# Altium PCB pcb.PcbDoc (part 2 of 2)
Units mm, origin at the board's own origin, x right, y up, seen from the top; angles counter-clockwise.
Board outline 168.75 x 59.75 mm, 2 copper layers (Top Layer, Bottom Layer); 142 components, 131 nets, 492 pads, 85 vias.
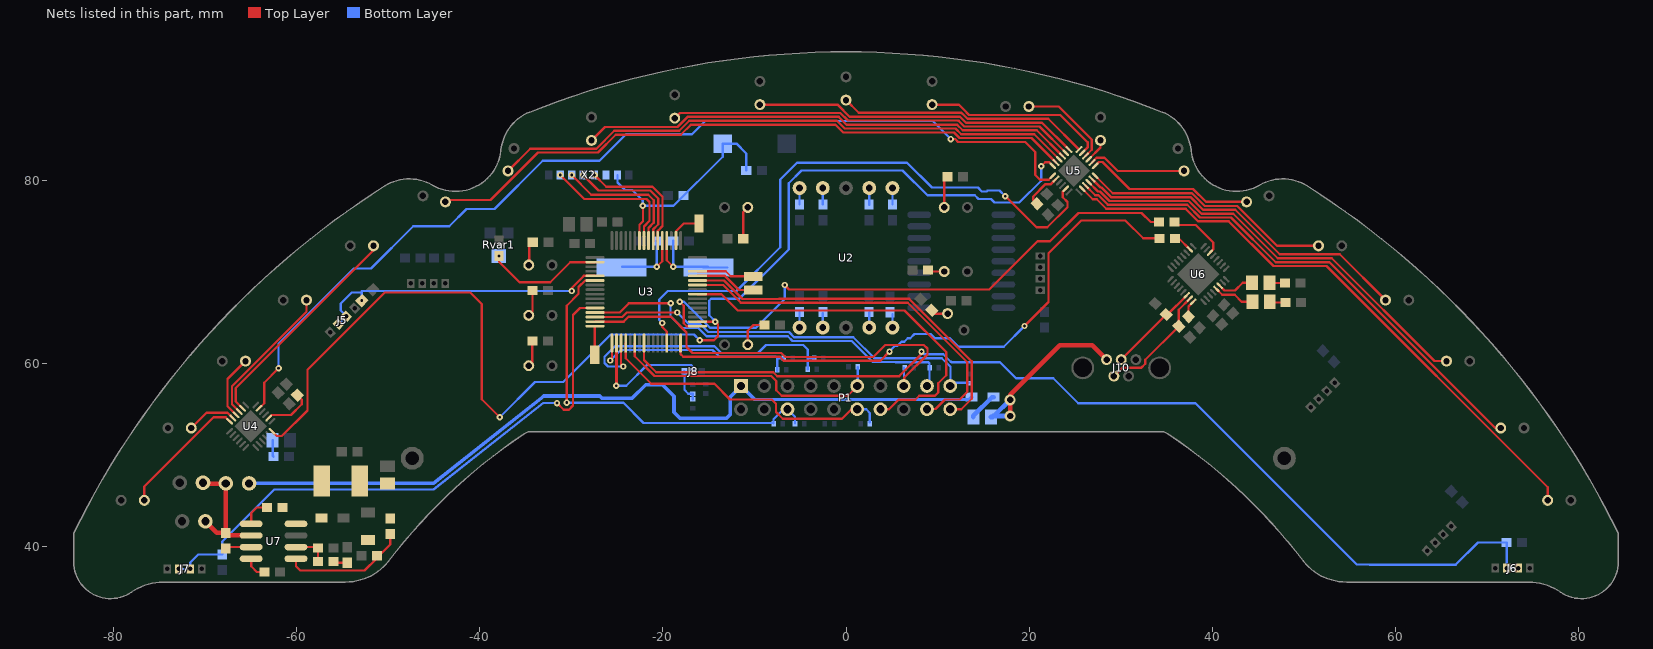
[diagram p2: the nets of this part, all layers, seen from the top]

## Via types
v1: diameter 0.7, hole 0.3, Top Layer to Bottom Layer, tented both sides, 82 vias
v2: diameter 1.2, hole 0.7, Top Layer to Bottom Layer, tented both sides, 2 vias
v3: diameter 1, hole 0.5, Top Layer to Bottom Layer, tented both sides, 1 vias

## Nets (pads, with @x,y where several pads share a name; then routed paths per layer and width w, separated by ;. In a path a pad name is that pad's centre, name@x,y a point inside that pad or via, vN(x,y) a via of type N, cw(c..) or ccw(c..) an arc to the next point about the centre after c; other vN are vias at no path point) (continued)
MOT-_OUT: P1.14 U3.40 | length 41.8
  Top Layer w0.25: U3.40@-16.225,67.525 -13.613,67.525 -11.833,65.745 -6.811,65.745 -6.806,65.75 6.4,65.75 10.95,61.2 10.95,58.675 10.075,57.8 10.075,56.775 9.72,56.42 7.995,56.42 7.57,55.995 5.745,55.995 4.7,54.95 4.19,54.95 P1.14@3.82,55.32
NetC5_1: C5.1 U6.16 | length 1.8
  Top Layer w0.25: C5.1@37.425,65.075 37.425,66.175 U6.16@37.934,66.684
NetC6_1: C6.1 U7.1 | length 3.2
  Top Layer w0.25: U7.1@-65,42.43 -65,43.6 -64.375,44.225 C6.1@-63.25,44.225
NetC6_2: C6.2 D33.1 L1.1 U7.8
NetC9_1: C9.1 FB4.1 L1.2 R48.2
NetC10_1: C10.1 C11.1 U7.6 | length 3.8
  Top Layer w0.25: U7.6@-60.1,39.89 C11.1@-57.79,39.89 ; C10.1@-57.7,38.3 C11.1@-57.7,39.8
NetC10_2: C10.2 R47.1 | length 1.4
  Top Layer w0.25: C10.2@-55.875,38.175 R47.1@-54.5,38.175
NetC12_1: C12.1 D35.2 F1.2 R45.1 U7.2 | length 12.9
  Top Layer w0.5: D35.2@-70.135,46.8 F1.2@-67.825,46.8 ; C12.1@-70,42.7 -68.75,41.45 R45.1@-67.775,41.45 F1.2@-67.775,46.85 ; R45.1@-67.485,41.16 U7.2@-65,41.16
NetC13_1: C13.1 U7.4 | length 2.5
  Top Layer w0.25: U7.4@-65,38.62 -65,37.8 -64.375,37.175 C13.1@-63.55,37.175
NetD1_1: D1.1 R1.1 | length 3.5
  Top Layer w0.25: D1.1@10.73,77.002 10.73,79.98 R1.1@11.1,80.35
NetD2_2: D2.2 R10.1 | length 3.6
  Top Layer w0.25: D2.2@-10.73,62 -10.73,63.52 -10.1,64.15 R10.1@-8.925,64.15
NetD3_2: D3.2 R11.1 | length 3.6
  Top Layer w0.25: R11.1@-11.225,73.575 -11.225,76.507 D3.2@-10.73,77.002
NetD4_1: D4.1 R6.1 | length 2.7
  Top Layer w0.25: D4.1@-34.663,70.706 -34.6,70.769 -34.6,72.825 R6.1@-34.225,73.2
NetD5_1: D5.1 R7.1 | length 1.6
  Top Layer w0.25: R7.1@9.098,70.002 D5.1@10.73,70.002
NetD6_1: D6.1 R15.1 | length 2.9
  Top Layer w0.25: D6.1@-34.663,65.206 -34.25,65.619 R15.1@-34.25,67.925
NetD7_1: D7.1 R16.1 | length 1.9
  Top Layer w0.25: R16.1@9.375,65.775 9.75,65.4 D7.1@11.102,65.4
NetD8_1: D8.1 R20.1 | length 2.9
  Top Layer w0.25: D8.1@-34.663,59.706 -34.275,60.094 R20.1@-34.275,62.425
NetD9_2: D9.2 U4.12 | length 14.1
  Top Layer w0.25: D9.2@-76.672,44.998 -76.672,46.503 -69.1,54.075 -67.787,54.075 U4.12@-67.35,53.638
NetD10_2: D10.2 U4.11 | length 5.5
  Top Layer w0.25: D10.2@-71.542,52.899 -69.866,54.575 -67.58,54.575 U4.11@-66.997,53.992
NetD11_2: D11.2 U4.10 | length 7.1
  Top Layer w0.25: U4.10@-66.643,54.345 -67.575,55.277 -67.575,58.254 D11.2@-65.613,60.216
NetD12_2: D12.2 U4.9 | length 15.9
  Top Layer w0.25: U4.9@-66.29,54.699 -67.09,55.499 -67.09,57.46 -58.952,65.598 D12.2@-58.952,66.881
NetD13_2: D13.2 U4.8 | length 24.3
  Top Layer w0.25: U4.8@-65.936,55.052 -66.67,55.786 -66.67,57.28 -51.631,72.319 D13.2@-51.631,72.81
NetD14_2: D14.2 U5.23 | length 71.9
  Top Layer w0.25: D14.2@-43.773,77.611 -43.56,77.825 -38.831,77.825 -33.655,83.001 -27.099,83.001 -25.148,84.952 -18.048,84.952 -16.95,86.05 -1.15,86.05 -0.3,85.2 11.794,85.2 12.409,84.585 20.274,84.585 U5.23@22.947,81.912
NetD15_2: D15.2 U5.22 | length 64.3
  Top Layer w0.25: D15.2@-36.935,80.99 -34.5,83.425 -27.275,83.425 -25.324,85.376 -18.231,85.376 -17.133,86.474 -0.974,86.474 -0.124,85.624 11.931,85.624 11.935,85.62 11.968,85.62 12.583,85.005 20.561,85.005 U5.22@23.301,82.265
NetD16_2: D16.2 U5.21 | length 54.3
  Top Layer w0.25: D16.2@-27.812,84.325 -26.337,85.8 -18.406,85.8 -17.308,86.898 -0.799,86.898 0.051,86.048 12.101,86.048 12.109,86.04 12.142,86.04 12.757,85.425 20.848,85.425 U5.21@23.654,82.619
NetD17_2: D17.2 U5.20 | length 44.8
  Top Layer w0.25: D17.2@-18.712,86.763 -18.153,87.322 -0.623,87.322 0.207,86.492 12.257,86.492 12.289,86.46 12.316,86.46 12.931,85.845 21.135,85.845 U5.20@24.008,82.972
NetD18_2: D18.2 U5.19 | length 35.8
  Top Layer w0.25: D18.2@-9.408,88.237 -0.938,88.237 0.383,86.916 12.433,86.916 12.469,86.88 12.49,86.88 13.105,86.265 21.422,86.265 U5.19@24.361,83.326
NetD19_2: D19.2 U5.18 | length 27.7
  Top Layer w0.25: D19.2@0,88.73 1.39,87.34 12.608,87.34 12.648,87.3 12.664,87.3 13.279,86.685 22.098,86.685 U5.18@25.457,83.326
NetD20_2: D20.2 U5.17 | length 20.1
  Top Layer w0.25: D20.2@9.408,88.237 12.311,88.237 12.828,87.72 12.838,87.72 13.453,87.105 23.42,87.105 26.4,84.125 26.4,83.561 U5.17@25.811,82.972
NetD21_2: D21.2 U5.16 | length 10.5
  Top Layer w0.25: D21.2@19.982,88.033 23.242,88.033 26.85,84.425 26.85,83.304 U5.16@26.165,82.619
NetD22_2: D22.2 U5.15 | length 2.6
  Top Layer w0.25: U5.15@26.518,82.265 27.812,83.559 D22.2@27.812,84.325
NetD23_2: D23.2 U5.14 | length 10.9
  Top Layer w0.25: U5.14@26.872,81.912 27.385,82.425 28.25,82.425 29.685,80.99 D23.2@36.935,80.99
NetD24_2: D24.2 U5.13 | length 18.5
  Top Layer w0.25: U5.13@27.225,81.558 27.642,81.975 28.025,81.975 30.975,79.025 37.925,79.025 39.339,77.611 D24.2@43.773,77.611
NetD25_2: D25.2 U5.12 | length 27.6
  Top Layer w0.25: U5.12@27.225,80.462 29.137,78.55 37.806,78.55 39.197,77.159 42.75,77.159 47.099,72.81 D25.2@51.631,72.81
NetD26_2: D26.2 U5.11 | length 37.6
  Top Layer w0.25: U5.11@26.872,80.108 27.805,79.175 27.918,79.175 28.963,78.13 37.632,78.13 39.023,76.739 42.528,76.739 47.388,71.879 53.954,71.879 D26.2@58.952,66.881
NetD27_2: D27.2 U5.10 | length 47.2
  Top Layer w0.25: U5.10@26.518,79.755 27.522,78.751 27.748,78.751 28.789,77.71 37.458,77.71 38.849,76.319 42.306,76.319 47.185,71.44 53.085,71.44 64.309,60.216 D27.2@65.613,60.216
NetD28_2: D28.2 U5.9 | length 56.4
  Top Layer w0.25: U5.9@26.165,79.401 27.239,78.327 27.578,78.327 28.615,77.29 37.284,77.29 38.675,75.899 42.076,75.899 46.955,71.02 52.83,71.02 70.951,52.899 D28.2@71.542,52.899
NetD29_2: D29.2 U5.8 | length 65.8
  Top Layer w0.25: U5.8@25.811,79.048 26.956,77.903 27.408,77.903 28.441,76.87 37.11,76.87 38.501,75.479 41.821,75.479 46.7,70.6 52.5,70.6 76.672,46.428 D29.2@76.672,44.998
NetD30_2: D30.2 FB1.2 | length 3.2
  Bottom Layer w0.5: FB1.2@13.925,54.1 13.925,54.244 15.956,56.275 D30.2@16.125,56.275
NetD31_1: D31.1 U6.22 | length 4.1
  Top Layer w0.25: U6.22@40.833,68.452 41.361,67.925 42.5,67.925 43.35,68.775 D31.1@44.375,68.775
NetD31_2: D31.2 R42.2 | length 1.7
  Top Layer w0.25: D31.2@46.3,68.75 R42.2@47.975,68.75
NetD32_1: D32.1 U6.21 | length 4.5
  Top Layer w0.25: U6.21@40.48,68.099 41.124,67.455 42.47,67.455 43.225,66.7 D32.1@44.4,66.7
NetD32_2: D32.2 R43.2 | length 1.6
  Top Layer w0.25: D32.2@46.375,66.625 R43.2@48,66.625
NetD34_2: D34.2 R46.1 | length 1.8
  Bottom Layer w0.25: D34.2@-62.65,51.55 -62.65,49.875 R46.1@-62.55,49.775
NetFB1_1: FB1.1 J10.1 | length 20.5
  Top Layer w0.5: v2(17.935,54.209) v2(17.935,55.984) 17.935,56.535 23.35,61.95 26.9,61.95 J10.1@28.475,60.375
  Bottom Layer w0.5: FB1.1@15.825,54.1 16.051,54.1 FB1.1@16.16,54.209 ; FB1.1@16.051,54.209 FB1.1@16.16,54.209 ; v2(17.935,54.209) FB1.1@16.16,54.209 ; v2(17.935,55.984) FB1.1@16.16,54.209
NetJ8_3: J8.3 R38.1 R39.2 | length 4
  Bottom Layer w0.25: J8.3@-17.85,58.925 J8.3@-17.65,59.125 -17.65,57.075 -17.225,56.65 R38.1@-16.75,56.65 R39.2@-16.75,56.05
NetR2_2: R2.2 U2.1 | length 1.7
  Bottom Layer w0.25: U2.1@-5.08,63.88 R2.2@-5.08,65.58
NetR3_1: R3.1 U2.10 | length 1.8
  Bottom Layer w0.25: R3.1@-5.08,77.32 U2.10@-5.08,79.12
NetR4_2: R4.2 U2.2 | length 1.6
  Bottom Layer w0.25: U2.2@-2.54,63.88 R4.2@-2.54,65.46
NetR5_1: R5.1 U2.9 | length 1.8
  Bottom Layer w0.25: R5.1@-2.54,77.34 U2.9@-2.54,79.12
NetR8_2: R8.2 U2.4 | length 1.7
  Bottom Layer w0.25: U2.4@2.54,63.88 R8.2@2.54,65.56
NetR9_1: R9.1 U2.7 | length 1.8
  Bottom Layer w0.25: R9.1@2.525,77.3 U2.7@2.525,79.105
NetR12_2: R12.2 U2.5 | length 1.4
  Bottom Layer w0.25: U2.5@5.08,63.88 R12.2@5.08,65.32
NetR13_1: R13.1 U2.6 | length 1.8
  Bottom Layer w0.25: R13.1@5.08,77.32 U2.6@5.08,79.12
NetR25_1: R25.1 U4.2 | length 5.4
  Top Layer w0.25: U4.2@-63.072,53.992 -62.739,54.325 -60.65,54.325 -59.475,55.5 -59.475,56.025 R25.1@-59.95,56.5
NetR33_1: R33.1 U5.2 | length 4
  Top Layer w0.25: R33.1@20.7,77.6 20.45,77.85 20.45,78.2 21.8,79.55 22.389,79.55 U5.2@22.947,80.108
NetR40_1: R40.1 U6.30 | length 6.2
  Top Layer w0.25: R40.1@35.95,75.075 38.212,75.075 40.125,73.162 40.125,72.411 U6.30@39.773,72.058
NetR41_1: R41.1 U6.2 | length 1.7
  Top Layer w0.25: R41.1@36.368,73.625 U6.2@37.581,72.412
NetR45_2: R45.2 U7.3 | length 2.6
  Top Layer w0.25: R45.2@-67.635,39.89 U7.3@-65,39.89
NetR48_1: R48.1 R49.2 U7.5 | length 13.9
  Top Layer w0.25: U7.5@-60.1,38.62 -60.1,37.8 -59.625,37.325 -52.6,37.325 -51.25,38.675 R49.2@-51.25,38.95 ; R49.2@-51.2,39 R49.2@-51.25,38.95 ; R48.1@-49.8,41.3 -49.8,40.175 -51.025,38.95 R49.2@-51.25,38.95
NetU3_16: U3.16 X8.1 | length 3.1
  Top Layer w0.25: X8.1@-27.45,60.9 U3.16@-27.45,64
NetU3_44: U3.44 X5.1 | length 6.7
  Top Layer w0.25: U3.44@-16.225,69.525 -13.231,69.525 -11.681,67.975 X5.1@-10.125,67.975
NetU3_45: U3.45 X6.1 | length 6.3
  Top Layer w0.25: U3.45@-16.225,70.025 -13.137,70.025 -12.587,69.475 X6.1@-10.125,69.475
NetU3_50: U3.50 X7.1 | length 3.9
  Top Layer w0.25: U3.50@-18.575,73.375 -18.575,74.406 -17.731,75.25 X7.1@-16.075,75.25
NetU4_5: U4.5 U5.1 | length 106.9
  Top Layer w0.25: U4.5@-64.133,55.052 -63.575,55.61 -63.575,57.85 v1(-62,59.425) ; v1(11.45,84.475) 11.925,84.475 12.25,84.15 19.575,84.15 20.675,83.05 20.675,80.55 21.2,80.025 22.157,80.025 U5.1@22.594,80.462
  Bottom Layer w0.25: v1(-62,59.425) -62,62.1 -53.775,70.325 -51.9,70.325 -47.275,74.95 -43.35,74.95 -41.475,76.825 -38.4,76.825 -33.125,82.1 -26.925,82.1 -24.025,85 -16.825,85 -15.375,86.45 9.475,86.45 v1(11.45,84.475)
NEUTRE_IN: J8.1 U3.18 | length 14.5
  Top Layer w0.3: v1(-25.1,57.525) -25.075,57.55 U3.18@-25.075,62.175
  Bottom Layer w0.25: v1(-25.1,57.525) -24,57.525 -21.75,59.775 -16.925,59.775 -16.7,59.55 J8.1@-16.7,59.125
NRST: C18.2 R44.1 SW1.2 U3.58 X2.2 | length 26.4
  Top Layer w0.25: U3.58@-22.575,73.375 -22.575,75.102 -22.18,75.497 -22.18,77.155 v1(-22.2,77.175)
  Bottom Layer w0.25: X2.2@-24.975,80.55 -24.975,79.725 -24.15,78.9 -23.35,78.9 -22.2,77.75 v1(-22.2,77.175) ; v1@-22.425,77.175 v1(-22.2,77.175) ; C18.2@-10.9,81.05 -10.9,82.9 -11.975,83.975 SW1.2@-13.475,83.975 -13.475,82.55 -18.85,77.175 v1(-22.2,77.175)
O\E\: U3.34 U4.24 U5.24 | length 132.4
  Top Layer w0.25: U4.24@-62.719,52.542 -62.202,52.025 -61.65,52.025 -58.85,54.825 -58.85,59.262 -50.412,67.7 -41.05,67.7 -39.8,66.45 -39.8,56.05 v1(-37.825,54.075) ; U3.34@-16.225,64.525 -14.25,64.525 -13.975,64.25 -13.975,62.95 -14.425,62.5 v1(-15.975,62.5) ; v1(21.325,81.5) 21.775,81.95 22.202,81.95 U5.24@22.594,81.558
  Bottom Layer w0.25: v1(-37.825,54.075) -33.975,57.925 -30.9,57.925 -25.7,63.125 -16.6,63.125 v1(-15.975,62.5) ; v1@-14.2,64.375 -14.25,64.425 -14.25,64.525 -14.95,65.225 -14.95,66.802 -14.712,67.04 -11.628,67.04 -6.255,72.413 -6.255,79.65 -4.855,81.05 6.185,81.05 8.91,78.325 14.075,78.325 14.485,77.915 15.848,77.915 16.22,77.542 18.942,77.542 21.325,79.925 v1(21.325,81.5)
  other v1: -14.3,64.525
OIL_IN: R27.1 R29.2 U3.19 | length 32
  Top Layer w0.25: U3.19@-24.575,62.175 -24.575,59.85 v1(-24.35,59.625)
  Bottom Layer w0.25: v1(-24.35,59.625) -24.355,59.63 -26.017,59.63 -26.395,60.008 -26.395,60.68 -25.23,61.845 -14.381,61.845 -13.641,61.105 -9.605,61.105 -8.73,61.98 -4.68,61.98 -4.175,61.475 -4.175,60.525 ; R27.1@-4.175,59.3 -4.175,60.525 ; R29.2@-3.475,60.525 -4.175,60.525
PAL_D: J6.2 J6.3 R22.1 U3.24 | length 112.8
  Top Layer w0.25: U3.24@-22.075,62.175 -22.075,60.331 -20.744,59 -7.945,59 -7.5,58.555 5.805,58.555 8.25,61 v1(8.25,61.25)
  Bottom Layer w0.25: v1(8.25,61.25) 8.535,60.965 10.635,60.965 11.45,60.15 11.487,60.15 11.547,60.09 16.835,60.09 18.575,58.35 22.637,58.35 25.377,55.61 38.177,55.61 55.807,37.98 57.195,37.98 57.2,37.975 66.625,37.975 69.05,40.4 72.15,40.4 R22.1@72.175,40.375 72.2,40.35 J6.3@72.2,37.6 J6.2@73.45,37.6
PAL_G: J7.2 J7.3 R23.1 U3.12 | length 64.3
  Top Layer w0.25: v1(-31.575,55.625) -30.85,54.9 -30.275,54.9 -29.82,55.355 -29.82,65.26 -29.055,66.025 U3.12@-27.425,66.025
  Bottom Layer w0.25: J7.3@-72.9,37.5 J7.2@-71.65,37.5 -71.65,38.2 -70.775,39.075 R23.1@-68.15,39.075 -68.15,40.5 -62.475,46.175 -45.075,46.175 -33.075,55.625 v1(-31.575,55.625)
POS1_IN: P1.12 R31.1 U3.20 | length 33.2
  Top Layer w0.25: U3.20@-24.075,62.175 -24.075,60.525 -21.275,57.725 -14.375,57.725 -12.675,56.025 -8.125,56.025 -7.65,55.55 -7.65,54.65 -6.9,53.9 -0.45,53.9 0.6,54.95 P1.12@1.25,54.95
  Bottom Layer w0.25: P1.12@1.25,54.95 2.2,54.95 2.6,54.55 R31.1@2.6,53.5
POS2_IN: P1.11 R30.1 U3.22 | length 30.3
  Top Layer w0.25: U3.22@-23.075,62.175 -23.075,60.737 -20.918,58.58 -8.18,58.58 -7.625,58.025 -7.625,57.025 -7.025,56.425 0.185,56.425 P1.11@1.25,57.49
  Bottom Layer w0.25: P1.11@1.28,57.86 R30.1@1.28,59.57
RAPPORT1_IN: P1.17 R35.1 U3.13 | length 43.4
  Top Layer w0.25: U3.13@-27.425,65.525 -24.725,65.525 -23.725,66.525 v1(-19.15,66.525)
  Bottom Layer w0.25: v1(-19.15,66.525) -19.175,66.5 -19.175,65.1 -17.9,63.825 -16.154,63.825 -15.244,62.915 -6.365,62.915 -5.85,62.4 0.631,62.4 2.926,60.105 5.42,60.105 5.425,60.1 8.975,60.1 9.125,59.95 9.125,57.745 P1.17@9.07,57.69 ; P1.17@8.87,57.49 P1.17@9.07,57.69 ; P1.17@8.9,57.86 P1.17@9.07,57.69
RAPPORT2_IN: P1.19 R36.1 U3.14 | length 45.6
  Top Layer w0.25: U3.14@-27.425,65.025 -24.45,65.025 -23.95,65.525 v1(-18.45,65.525)
  Bottom Layer w0.25: v1(-18.45,65.525) -17.22,64.295 -15.96,64.295 -15.05,63.385 -6.241,63.385 -5.676,62.82 0.805,62.82 3.1,60.525 10.475,60.525 11.41,59.59 P1.19@11.41,57.49 ; P1.19@11.44,57.86 R36.1@13.415,57.86
RAPPORT3_IN: P1.15 R37.1 U3.15 | length 46.8
  Top Layer w0.25: U3.15@-27.425,64.525 -24.285,64.525 -23.755,65.055 -19.13,65.055 -17.425,63.35 -17.425,61.75 -16.775,61.1 -7.075,61.1 -6.63,60.655 2.98,60.655 4.3,61.975 8.5,61.975 8.895,61.58 8.895,60.945 6.36,58.41 P1.15@6.36,57.86
  Bottom Layer w0.25: P1.15@6.33,57.49 R37.1@6.33,59.5
ROT_IN: R26.1 R28.2 U3.17 | length 23.1
  Top Layer w0.25: v1(-25.75,60.275) -25.575,60.45 U3.17@-25.575,62.175
  Bottom Layer w0.25: v1(-25.75,60.275) -24.6,61.425 -14.575,61.425 -13.825,60.675 -7.675,60.675 -7.525,60.525 ; R26.1@-7.525,59.125 -7.525,60.525 ; R28.2@-6.825,60.525 -7.525,60.525
RX_USB: R40.2 U3.33 | length 64.8
  Top Layer w0.25: v1(-18.175,66.7) -17.725,66.25 -17.725,64.35 -17.4,64.025 U3.33@-16.225,64.025 ; v1(-6.705,68.525) -6.215,68.035 15.66,68.035 20.925,73.3 22.3,73.3 25.4,76.4 32.3,76.4 33.3,75.4 33.925,75.4 R40.2@34.25,75.075
  Bottom Layer w0.25: v1(-18.175,66.7) -17.7,66.7 -14.855,63.855 -9.845,63.855 -6.705,66.995 v1(-6.705,68.525)
SDI: U3.29 U5.5 | length 66.5
  Top Layer w0.25: v1(-20.075,64.375) -20.075,63.95 -19.575,63.45 U3.29@-19.575,62.175 ; v1(17.4,78.225) 17.425,78.225 20.825,74.825 22,74.825 24.2,77.025 24.2,77.6 23.687,78.113 23.687,78.727 U5.5@24.008,79.048
  Bottom Layer w0.25: v1(-20.075,64.375) -20.4,64.7 -20.4,66.95 -19.47,67.88 -11.976,67.88 -7.195,72.661 -7.195,80.045 -5.35,81.89 6.675,81.89 9.39,79.175 14.413,79.175 14.833,78.755 15.367,78.755 15.462,78.85 16.775,78.85 v1(17.4,78.225)
START_UC_OUT: P1.20 U3.43 | length 40.5
  Top Layer w0.25: U3.43@-16.225,69.025 -13.325,69.025 -11.305,67.005 -7.333,67.005 -7.328,67.01 6.922,67.01 13.75,60.182 13.75,56.1 12.6,54.95 P1.20@11.41,54.95
STOP_OUT: P1.18 U3.42 | length 41.5
  Top Layer w0.25: U3.42@-16.225,68.525 -13.425,68.525 -11.485,66.585 -7.159,66.585 -7.154,66.59 6.748,66.59 13.25,60.088 13.25,56.85 12.425,56.025 10.825,56.025 9.775,54.975 9.245,54.975 P1.18@8.9,55.32
TEMP_IN: C2.2 P1.6 R24.1 U3.6 | length 43.1
  Top Layer w0.25: v1(-30.525,55.675) -30.525,66.263 -29.22,67.568 -29.22,68.295 -28.49,69.025 U3.6@-27.425,69.025
  Bottom Layer w0.25: v1(-30.525,55.675) -24.35,55.675 -22.125,53.45 C2.2@-7.975,53.45 ; C2.2@-7.925,53.4 -7.925,53.85 -6.825,54.95 P1.6@-6.395,54.95 ; P1.6@-6.37,54.95 P1.6@-6.395,54.95 ; R24.1@-5.57,53.4 -5.57,54.125 P1.6@-6.395,54.95
TEST: X2.3
TX_USB: R41.2 U3.32 | length 65.3
  Top Layer w0.25: U3.32@-18.075,62.175 -18.075,60.975 -17.78,60.68 -7.249,60.68 -6.804,60.235 3.735,60.235 v1(4.75,61.25) ; v1(19.5,64.05) 22.125,66.675 22.125,72 25.7,75.575 30.525,75.575 32.475,73.625 R41.2@34.25,73.625
  Bottom Layer w0.25: v1(4.75,61.25) 4.75,61.287 5.358,61.895 5.639,61.895 6.059,62.315 6.365,62.315 6.76,62.71 7.016,62.71 7.481,63.175 9.27,63.175 9.736,62.709 11.366,62.709 12.3,61.775 17.225,61.775 v1(19.5,64.05)
USB_DM: C7.1 J10.2 U6.15 | length 13.1
  Top Layer w0.25: J10.2@29.275,58.575 30.17,59.47 32.245,59.47 32.7,59.925 32.7,60.35 C7.1@36.375,64.025 36.363,64.037 36.363,65.82 U6.15@37.581,67.038
USB_DP: C8.1 J10.3 U6.14 | length 9.9
  Top Layer w0.25: J10.3@30.075,60.375 C8.1@35,65.3 ; C8.1@35.136,65.3 U6.14@37.227,67.392
UTCK: U3.57 X2.7 | length 15.5
  Top Layer w0.25: v1(-31.225,80.55) -28.6,77.925 -21.794,77.925 -21.47,77.601 -21.47,75.539 -22.075,74.934 U3.57@-22.075,73.375
UTDI: U3.55 X2.5 | length 14.1
  Top Layer w0.25: v1(-28.725,80.55) -27.03,78.855 -21.395,78.855 -20.52,77.98 -20.52,75.159 -21.075,74.604 U3.55@-21.075,73.375
UTDO: U3.54 X2.4 | length 13.4
  Top Layer w0.25: v1(-27.475,80.55) -26.2,79.275 -21.15,79.275 -20.05,78.175 -20.05,74.965 -20.575,74.44 U3.54@-20.575,73.375
UTMS: U3.56 X2.6 | length 14.8
  Top Layer w0.25: v1(-29.975,80.55) -27.825,78.4 -21.604,78.4 -21,77.796 -21,75.344 -21.575,74.769 U3.56@-21.575,73.375
V_REG: C1.1 J5.2 J5.3 U3.5 | length 33.1
  Top Layer w0.25: v1@-30,67.875 -30,68.179 -28.654,69.525 U3.5@-27.425,69.525
  Bottom Layer w0.25: J5.3@-55.468,64.232 J5.2@-54.584,65.116 -55.204,65.736 -55.204,66.496 -54,67.7 -52.9,67.7 ; v1(-52.9,66.825) -52.9,67.875 -30.175,67.875 v1@-30,67.7
  other v1: -29.975,67.875
V_TEMPO: C19.1 Rvar1.3 U3.2 | length 13
  Top Layer w0.25: v1(-37.925,71.7) -37.925,71.075 -35.675,68.825 -32.325,68.825 -30.125,71.025 U3.2@-27.425,71.025
VIN: D30.1 F1.1 P1.1 | length 89.2
  Bottom Layer w0.3: -9.985,56.025 D30.1@13.475,56.025
  Bottom Layer w0.4: F1.1@-65.225,46.85 -45.125,46.85 -33,56.4 -26.93,56.4 -26.7,56.17 -23.347,56.17 -21.881,57.636 -20.061,57.636 -18.8,56.375 -18.8,54.625 -18.125,53.95 -13.084,53.95 -12.65,54.384 -12.65,56.29 P1.1@-11.45,57.49 ; P1.1@-11.42,57.86 -11.42,57.52 P1.1@-11.45,57.49 ; -9.985,56.025 P1.1@-11.45,57.49 ; D30.1@13.475,56.025 D30.1@13.725,56.275
XT2IN: C21.1 U3.53 X3.1 | length 9.7
  Top Layer w0.25: v1(-20.675,70.525) -20.075,71.125 U3.53@-20.075,73.375
  Bottom Layer w0.25: X3.1@-24.45,70.525 v1(-20.675,70.525) C21.1@-20.675,73.35
XT2OUT: C20.1 U3.52 X3.2 | length 12.4
  Top Layer w0.25: U3.52@-19.575,73.375 -19.575,71.225 v1(-18.875,70.525)
  Bottom Layer w0.25: C20.1@-18.875,73.35 v1(-18.875,70.525) X3.2@-15.1,70.525 ; X3.2@-15.6,70.45 X3.2@-15.025,70.45 X3.2@-12.975,70.45
pads on no net: P1.4 P1.7 P1.8 P1.13 U1.8 U3.7 U3.8 U3.9 U3.10 U3.11 U3.23 U3.30 U3.38 U4.1 U4.13 U4.14 U4.15 U4.16 U4.17 U4.18 U4.19 U4.20 U4.21 U4.22 U4.23 U6.3 U6.5 U6.6 U6.7 U6.8 U6.9 U6.10 U6.11 U6.12 U6.13 U6.18 U6.23 U6.25 U6.27 U6.28 U6.29 U6.31 U6.32

## Polygon pours and split planes (outlines as drawn)
3V3 on Top Layer "Top Layer-No Net 1" (solid, pour order 20): -54.3,51.5 -45.7,51.5 -45.7,47.9 -51.5,47.9 -51.5,49.3 -54.3,49.3
GND on Top Layer "Top Layer-No Net 1" (solid, remove dead copper, pour order 26): -84.441,38.313 cw(c-84.39,38.313) -84.441,38.313 -84.441,41.491 cw(c-84.39,41.491) -84.435,41.514 cw(c-0.015,0.057) -50.447,79.443 cw(c-47.739,75.18) -45.189,79.54 cw(c-45.214,79.496) -45.188,79.539 ccw(c-42.69,83.812) -37.764,83.323 cw(c-32.739,82.823) -34.596,87.52 cw(c-0.015,0.057) -0.015,94.108 cw(c-0.015,0.057) 34.567,87.52 cw(c32.71,82.823) 37.735,83.323 cw(c37.685,83.318) 37.735,83.322 ccw(c42.661,83.812) 45.159,79.539 ccw(c42.661,83.812) 45.16,79.54 ccw(c45.185,79.496) 45.159,79.539 45.16,79.54 cw(c47.709,75.18) 50.418,79.443 cw(c-0.015,0.057) 84.406,41.514 cw(c84.361,41.491) 84.411,41.491 84.411,38.313 cw(c80.35,38.313) 78.022,34.986 ccw(c74.612,30.111) 74.612,36.06 54.69,36.06 cw(c54.69,42.111) 49.893,38.423 cw(c49.933,38.454) 49.892,38.423 ccw(c-0.015,0.057) 34.795,52.507 -34.824,52.507 ccw(c-0.015,0.057) -49.922,38.423 cw(c-49.962,38.454) -49.922,38.423 cw(c-54.719,42.111) -54.719,36.06 -74.641,36.06 ccw(c-74.641,30.111) -78.051,34.986 cw(c-80.379,38.313)
NetC9_1 on Top Layer "Top Layer-No Net 1" (solid, pour order 21): -54.5,49.2 -51.6,49.2 -51.6,47.8 -48.8,47.8 -48.8,42.1 -50.8,42.1 -50.8,39.8 -53.5,39.8 -53.5,42.7 -51.1,42.7 -51.1,44.8 -54.5,44.8
NetC6_2 on Top Layer "Top Layer-No Net 1" (solid, pour order 22): -56.2,44.7 -55.8,44.7 -55.8,49.2 -58.8,49.2 -58.8,45.2 -62.5,45.2 -62.5,42.1 -56.2,42.1
3V3 on Bottom Layer "Top Layer-No Net 1" (solid, remove dead copper, pour order 23): -84.441,38.313 cw(c-84.39,38.313) -84.441,38.313 -84.441,41.491 cw(c-84.39,41.491) -84.435,41.514 cw(c-0.015,0.057) -50.447,79.443 cw(c-47.739,75.18) -45.189,79.54 cw(c-45.214,79.496) -45.188,79.539 ccw(c-42.69,83.812) -37.764,83.323 cw(c-32.739,82.823) -34.596,87.52 cw(c-0.015,0.057) -0.015,94.108 cw(c-0.015,0.057) 34.567,87.52 cw(c32.71,82.823) 37.735,83.323 cw(c37.685,83.318) 37.735,83.322 ccw(c42.661,83.812) 45.159,79.539 ccw(c42.661,83.812) 45.16,79.54 ccw(c45.185,79.496) 45.159,79.539 45.16,79.54 cw(c47.709,75.18) 50.418,79.443 cw(c-0.015,0.057) 84.406,41.514 cw(c84.361,41.491) 84.411,41.491 84.411,38.313 cw(c80.35,38.313) 78.022,34.986 ccw(c74.612,30.111) 74.612,36.06 54.69,36.06 cw(c54.69,42.111) 49.893,38.423 cw(c49.933,38.454) 49.892,38.423 ccw(c-0.015,0.057) 34.795,52.507 -34.824,52.507 ccw(c-0.015,0.057) -49.922,38.423 cw(c-49.962,38.454) -49.922,38.423 cw(c-54.719,42.111) -54.719,36.06 -74.641,36.06 ccw(c-74.641,30.111) -78.051,34.986 cw(c-80.379,38.313)

## Keep-outs
Keep-Out Layer:
  region: -80.364,36.513 cw(c-80.364,38.263) -82.114,38.263 cw(c-80.364,38.263) -80.364,40.013 cw(c-80.364,38.263) -78.614,38.263 cw(c-80.364,38.263)
  region: -58.48,53.687 ccw(c-56.929,53.687) -56.929,52.137 ccw(c-56.929,52.187) -56.929,52.137 -41.904,52.137 ccw(c-41.904,53.687) -40.354,53.687 ccw(c-40.404,53.687) -40.354,53.688 -40.354,65.712 ccw(c-41.904,65.712) -41.904,67.263 -49.779,67.263 ccw(c-49.779,65.712) -50.875,66.809 ccw(c-50.84,66.773) -50.877,66.807 ccw(c-50.854,66.762) -50.89,66.798 -58.027,59.661 ccw(c-57.992,59.625) -58.037,59.647 ccw(c-56.929,58.562) -58.48,58.562 ccw(c-58.429,58.562) -58.48,58.562
  region: -20.999,53.757 cw(c-20.999,55.507) -22.749,55.507 cw(c-20.999,55.507) -20.999,57.257 cw(c-20.999,55.507) -19.249,55.507 cw(c-20.999,55.507)
  region: -18.499,80.257 cw(c-18.499,82.007) -20.249,82.007 cw(c-18.499,82.007) -18.499,83.757 cw(c-18.499,82.007) -16.749,82.007 cw(c-18.499,82.007)
  region: 18.501,80.257 cw(c18.501,82.007) 16.751,82.007 cw(c18.501,82.007) 18.501,83.757 cw(c18.501,82.007) 20.251,82.007 cw(c18.501,82.007)
  region: 21.001,53.757 cw(c21.001,55.507) 19.251,55.507 cw(c21.001,55.507) 21.001,57.257 cw(c21.001,55.507) 22.751,55.507 cw(c21.001,55.507)
  region: 78.616,38.263 ccw(c80.366,38.263) 80.366,36.513 ccw(c80.366,38.263) 82.116,38.263 ccw(c80.366,38.263) 80.366,40.013 ccw(c80.366,38.263)
  region: 59.558,40.091 cw(c59.558,45.591) 54.058,45.591 cw(c59.558,45.591) 59.558,51.091 cw(c59.558,45.591) 65.058,45.591 cw(c59.558,45.591)
  region: 45.393,54.211 cw(c45.393,59.711) 39.893,59.711 cw(c45.393,59.711) 45.393,65.211 cw(c45.393,59.711) 50.893,59.711 cw(c45.393,59.711)
  region: 28.001,64.084 cw(c28.001,69.584) 22.501,69.584 cw(c28.001,69.584) 28.001,75.084 cw(c28.001,69.584) 33.501,69.584 cw(c28.001,69.584)
  lines w0.1: -35.248,52.222 cw(c-34.369,51.007) -34.369,52.507 34.369,52.507 cw(c34.369,51.007) 35.248,52.222 ; -35.249,52.223 ccw(c0,0.007) -49.947,38.403 cw(c-54.704,42.06) -54.704,36.06 -74.626,36.06 ccw(c-74.626,30.06) -78.066,34.976 cw(c-80.365,38.263) -84.376,38.263 -84.376,41.441 cw(c0,0.007) -50.405,79.35 cw(c-47.724,75.13) -45.2,79.446 ccw(c-42.675,83.762) -37.7,83.267 cw(c-32.724,82.773) -34.563,87.422 cw(c0,0.007) 0,94.007 cw(c0,0.007) 34.563,87.422 cw(c32.724,82.773) 37.7,83.267 ccw(c42.675,83.762) 45.2,79.446 cw(c47.724,75.13) 50.405,79.35 cw(c0,0.007) 84.376,41.441 84.376,38.263 cw(c80.365,38.263) 78.066,34.976 ccw(c74.626,30.06) 74.626,36.06 54.704,36.06 cw(c54.704,42.06) 49.947,38.403 ccw(c0,0.007) 35.249,52.223

## Other copper
Top Layer:
  text "JRY2011" at -4.25,69.625 h1.2
  text "TOP" at 75.5,41 h1.2
Bottom Layer:
  text "BOT" at 79.5,41 h1.2

## Silkscreen, mask and mechanical layers (free items; w line width, h text height)
Top Overlay:
  text "07/11:JA/JPR" at 54,53.5 h1.2
  text "Rev.1" at 62.5,51.5 h1.2
  text "3V3" at -45.7,48.8 h1.52
  text "GND" at 45.85,46.525 h1.52
Bottom Overlay:
  circle w0.381: c28.415,55.302 r0.178
  circle w0.254: c30.024,54.533 r0.127
  region: 30.397,56.287 30.397,55.777 30.907,55.777 30.907,56.287
  lines w0.152: 29.15,55.3 ccw(c30.031,55.419) 29.979,54.532 ; 29.827,55.3 cw(c30.708,55.181) 30.438,56.027
  lines w0.203: 28.55,55.3 32.073,55.3 ; 32.073,55.3 31.311,55.6 31.311,54.99 32.073,55.3
  lines w0.381: 31.413,55.3 31.514,55.3
  text "RST" at -10.325,86.45 h1.3
  text "3V3" at -45.4,46.475 h1.52
  text "GND" at 49.95,46.45 h1.52
Mechanical 1:
  lines w0.1: -74.805,36.06 -54.704,36.06 ccw(c-54.704,42.06) -49.947,38.403 cw(c0,0.007) -35.249,52.223 ; -74.626,36.06 ccw(c-74.626,30.06) -78.066,34.976 cw(c-80.365,38.263) -84.376,38.263 -84.376,41.441 cw(c0,0.007) -50.405,79.35 cw(c-47.724,75.13) -45.2,79.446 ccw(c-42.675,83.762) -37.7,83.267 cw(c-32.724,82.773) -34.563,87.422 cw(c0,0.007) 0,94.007 cw(c0,0.007) 34.563,87.422 cw(c32.724,82.773) 37.7,83.267 ccw(c42.675,83.762) 45.2,79.446 cw(c47.724,75.13) 50.405,79.35 cw(c0,0.007) 84.376,41.441 84.376,38.263 cw(c80.365,38.263) 78.066,34.976 ccw(c74.626,30.06) 74.626,36.06 ; -35.248,52.222 cw(c-34.369,51.007) -34.369,52.507 34.369,52.507 cw(c34.369,51.007) 35.248,52.222 ; 35.249,52.223 cw(c0,0.007) 49.947,38.404 ccw(c54.704,42.06) 54.704,36.06 74.805,36.06
Drill Drawing:
  text ".Legend" at 86.875,90.875 h1.52

## Text inside footprints (layer, text, board x,y; h text height)
C12: Bottom Overlay "+" at -69.8,43.4 h1.52
P1: Bottom Overlay "1" at -13.625,58.2 h1.27 r180